# Altium PCB NodeXNanoPCB.PcbDoc
Units mm, origin at the board's own origin, x right, y up, seen from the top; angles counter-clockwise.
Board outline 34.5 x 53 mm, 4 copper layers (Component Side, Ground Plane, Power Plane, Solder Side), stack 0.844 mm thick; 37 components, 47 nets, 431 pads, 0 vias.
Unrouted connection lines stored in the file: 132.
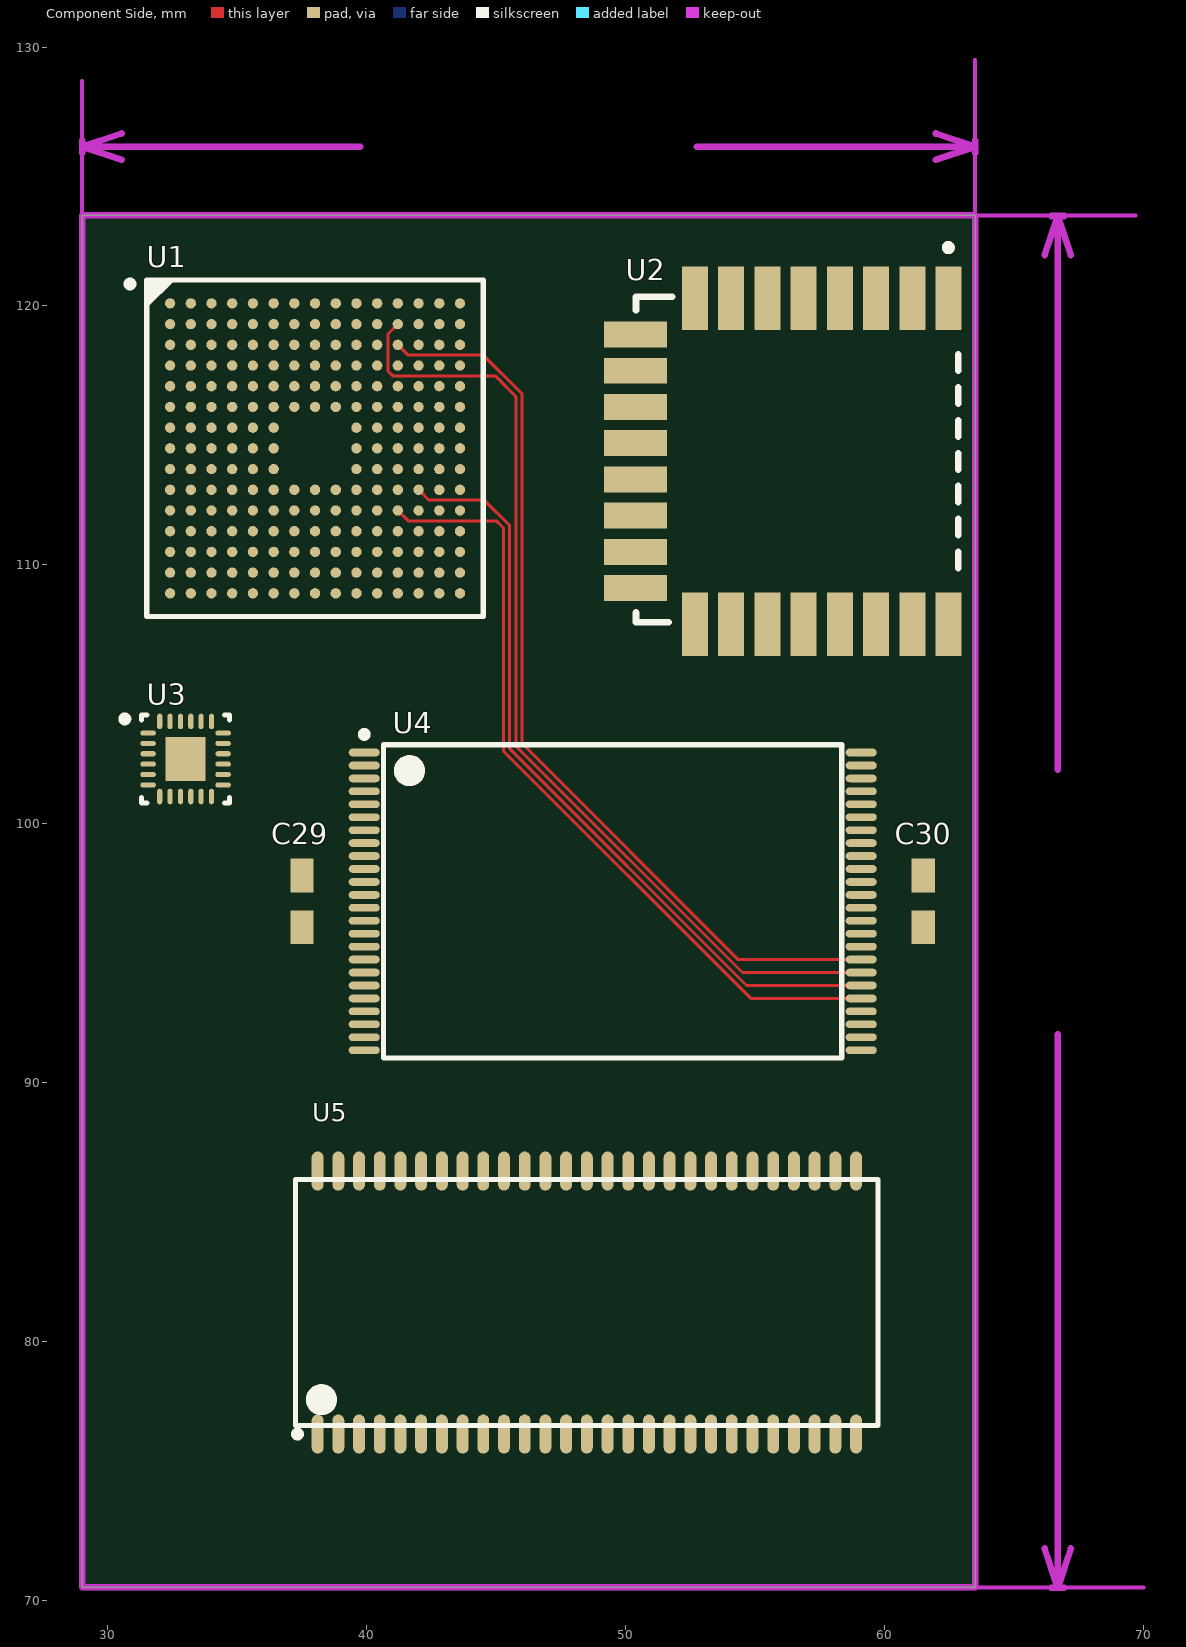
[diagram p0: Component Side view]
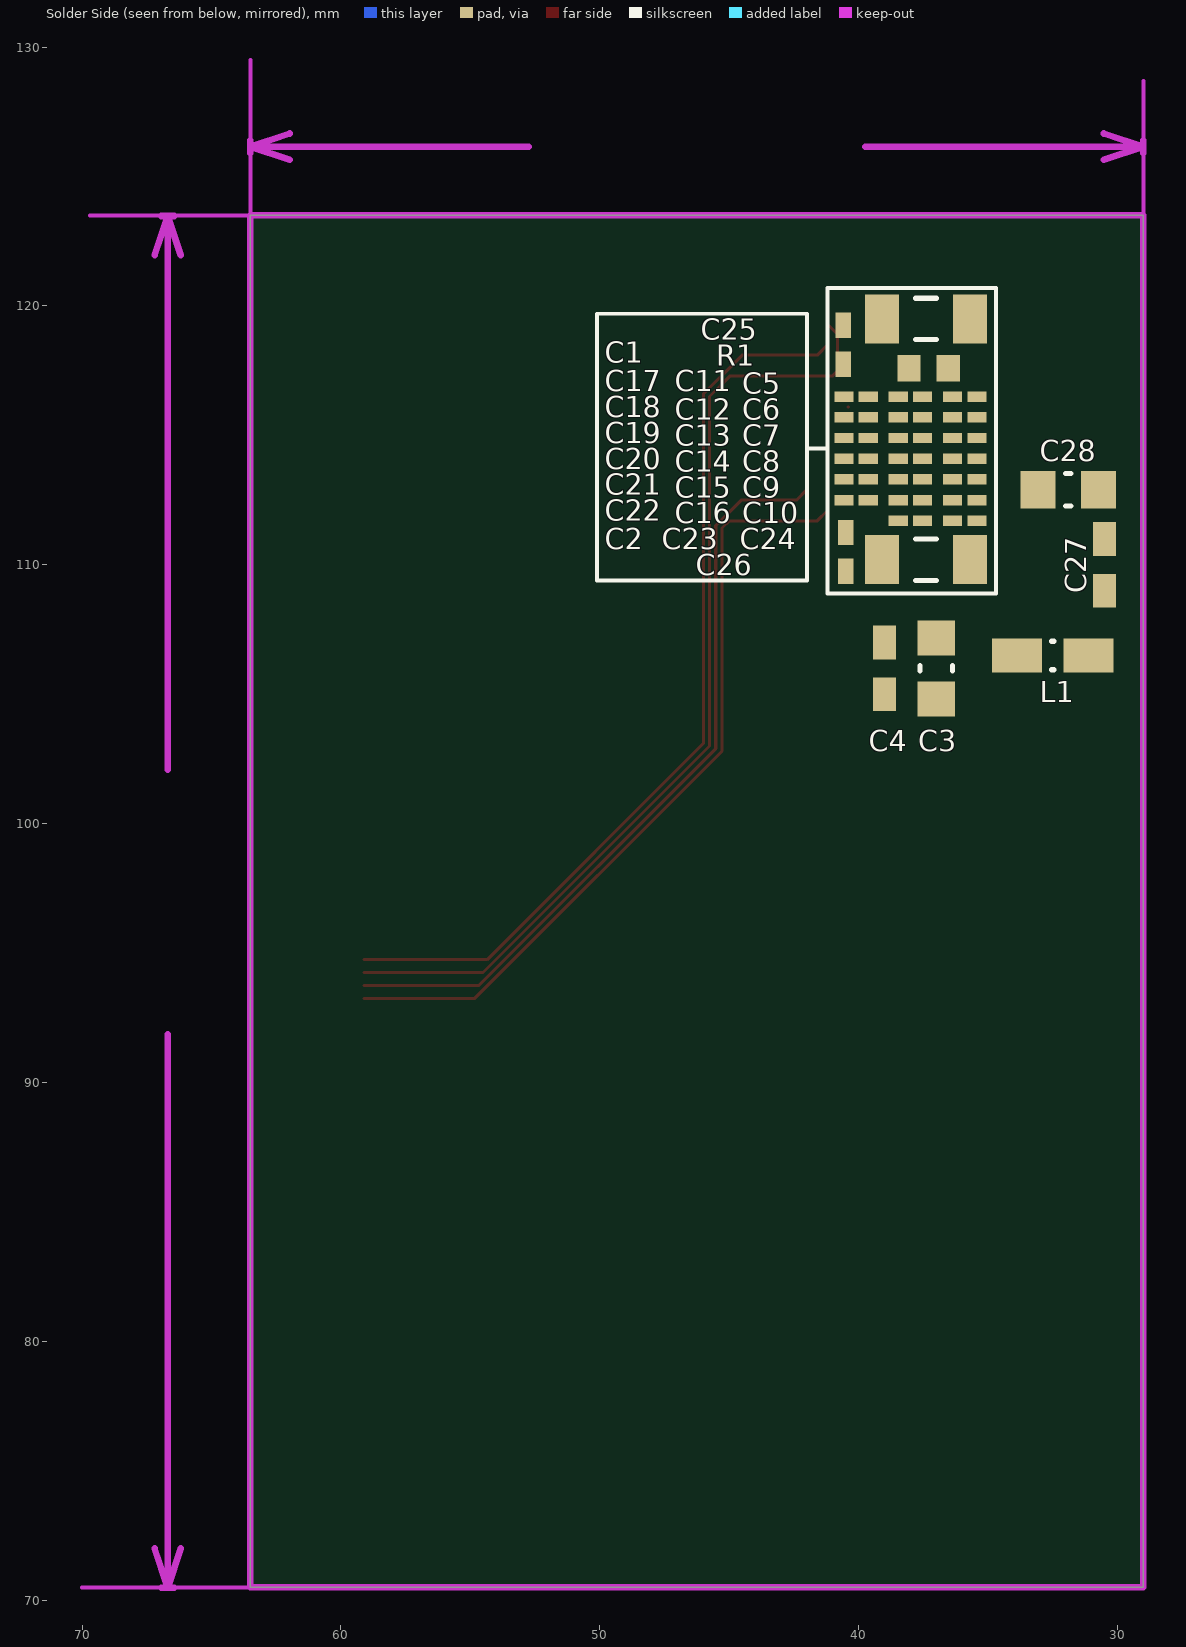
[diagram p1: Solder Side view, seen from below]
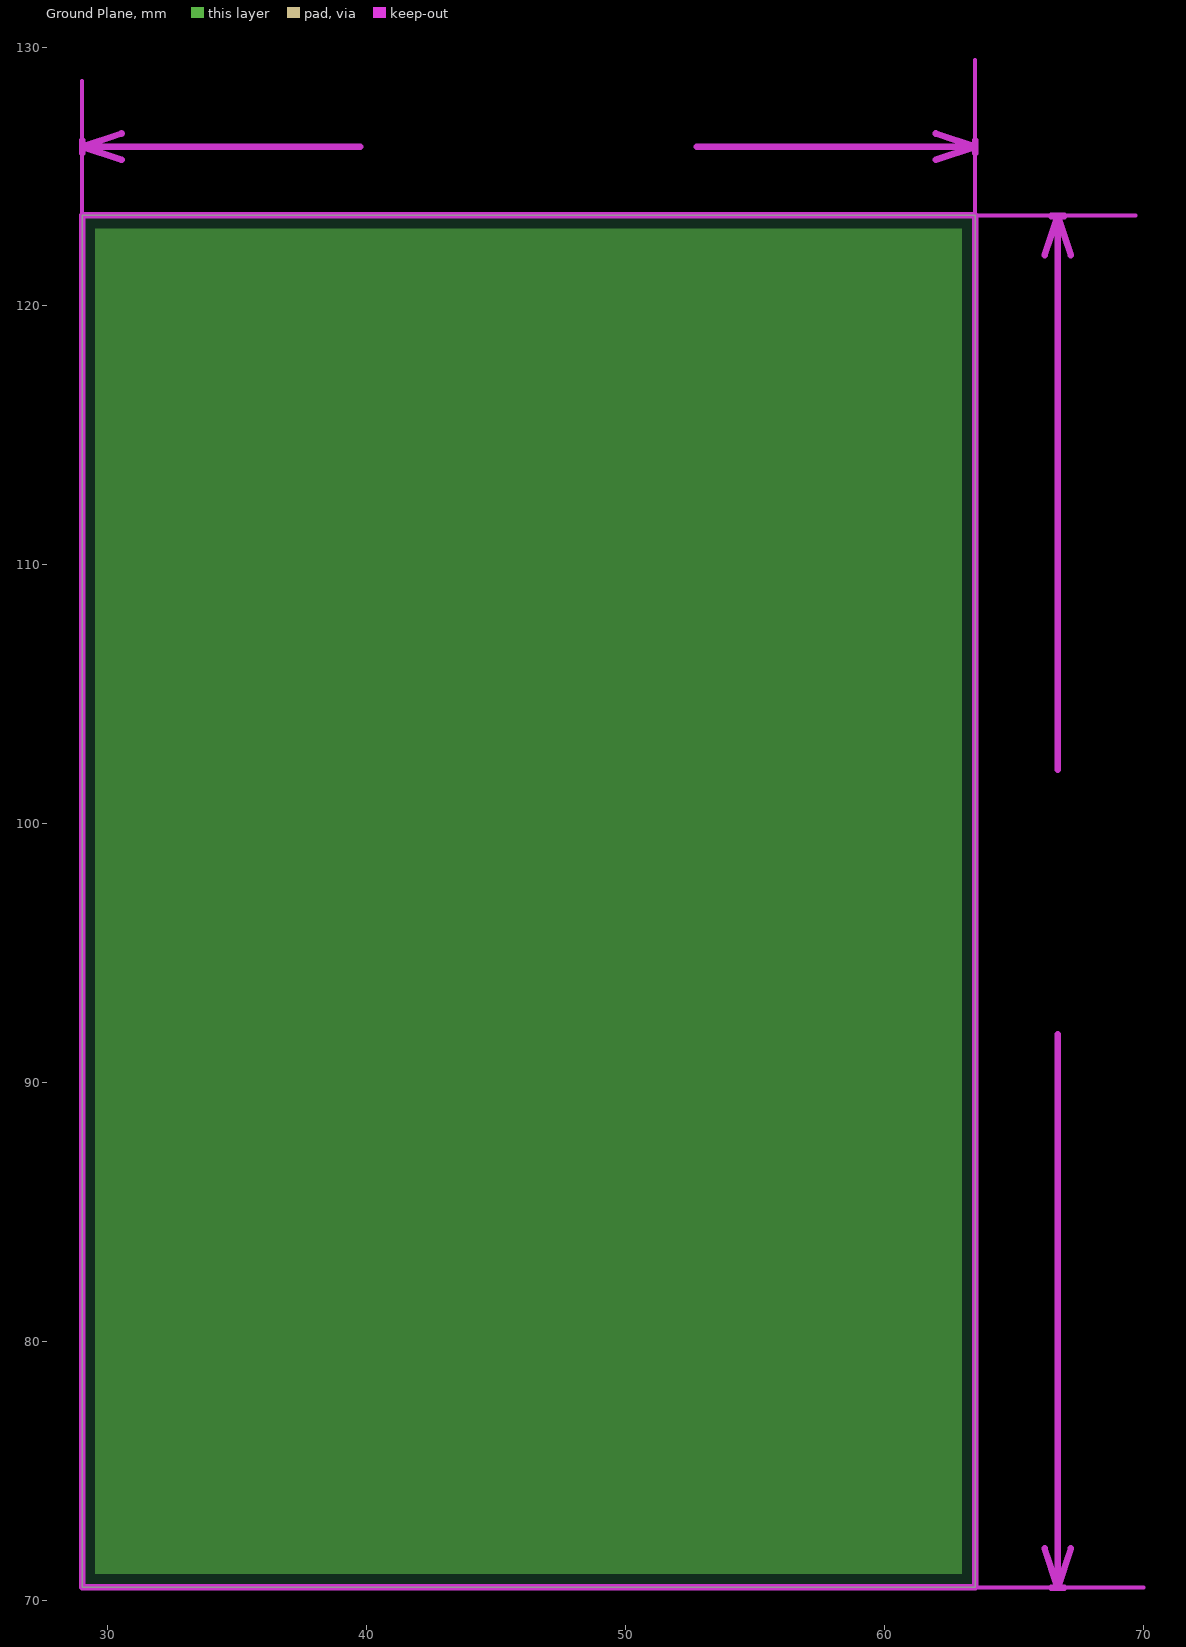
[diagram p2: Ground Plane, clearances drawn from the general rule]
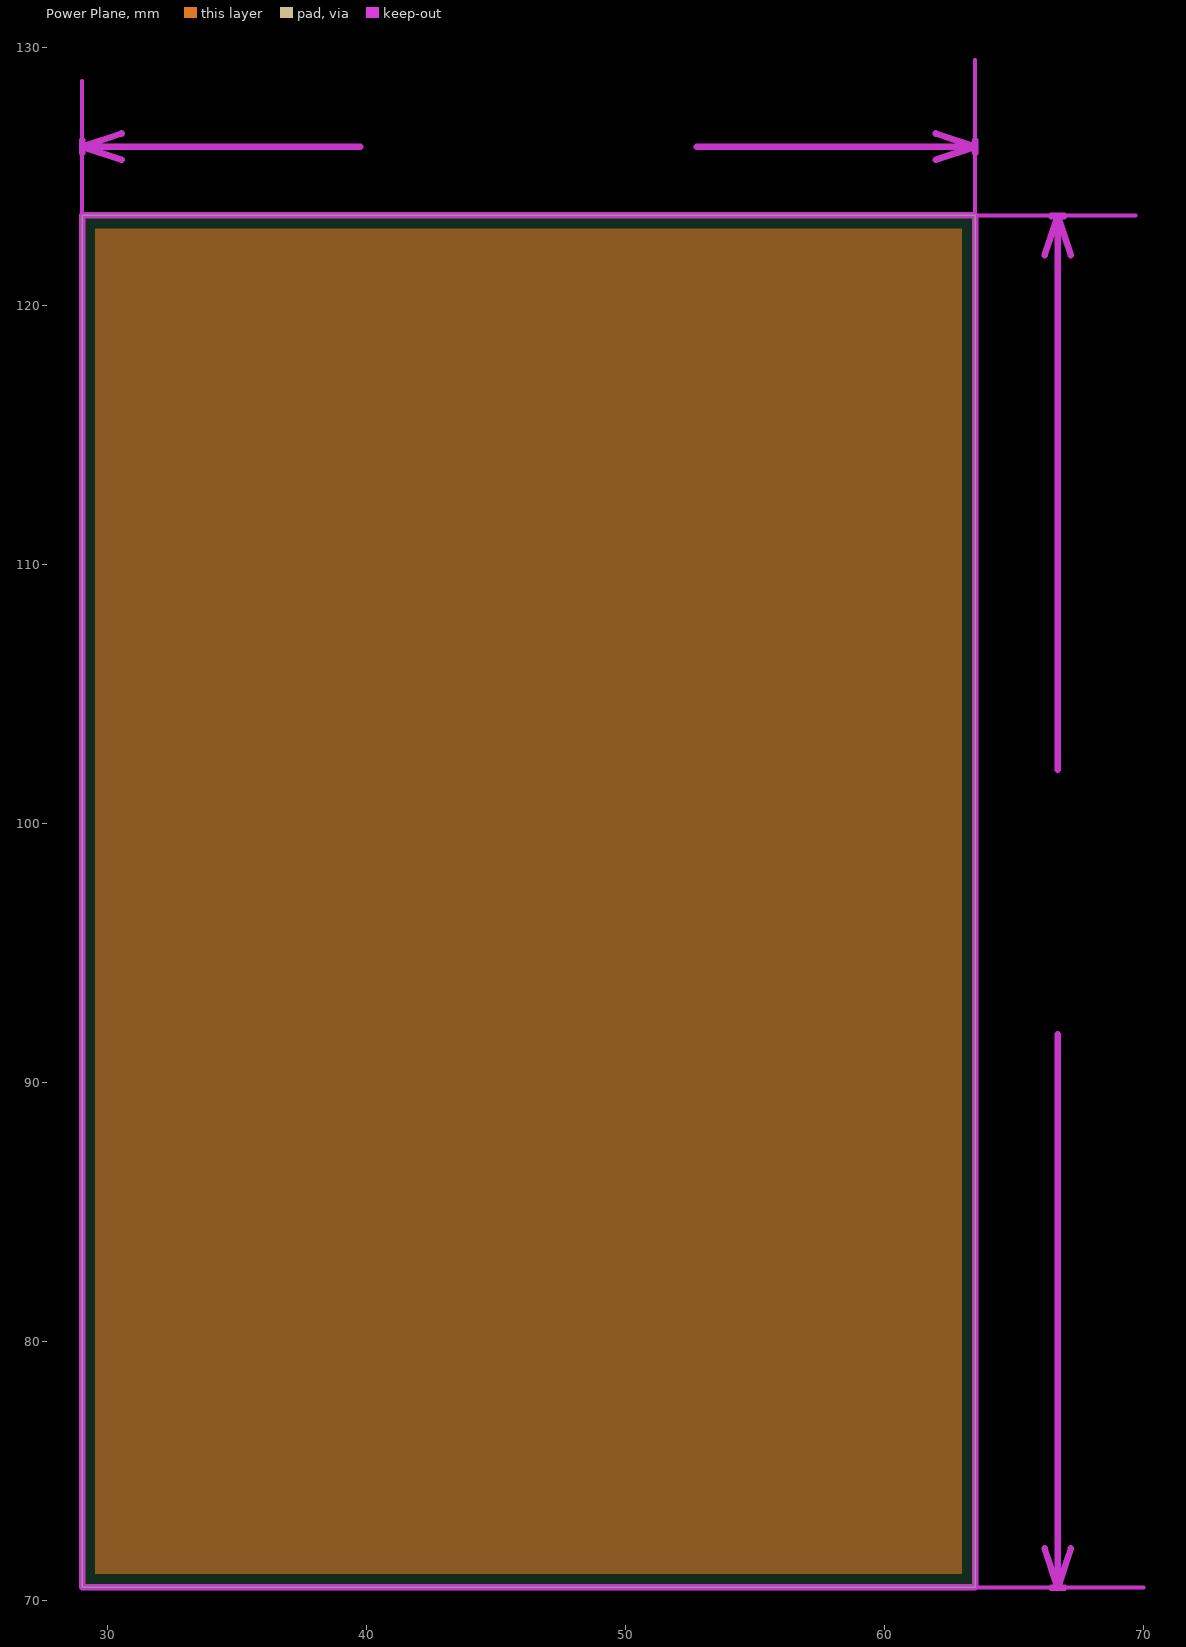
[diagram p3: Power Plane, clearances drawn from the general rule]

## Layer stack, top to bottom
Top Solder: solder mask 0.0102, Solder Resist, Dk 3.5
Component Side: signal copper 0.0356
Dielectric 1: core 0.32, FR-4, Dk 4.8
Ground Plane: plane copper 0.036
Dielectric 3: prepreg 0.127, Dk 4.2
Power Plane: plane copper 0.036
Dielectric 4: core 0.254, Dk 4.2
Solder Side: signal copper 0.0356
Bottom Solder: solder mask 0.0102, Solder Resist, Dk 3.5

## Board outline
29,70.5 63.5,70.5 63.5,123.5 29,123.5

## Design rules (kind name [scope] priority, off if disabled: settings)
Clearance [All] p1: gap=0.12
MinimumSolderMaskSliver [All] p1: minsoldermaskwidth=0.075
PlaneClearance [All] p1: clearance=0.2
PlaneConnect [All] p1: planeconnectstyle=Relief reliefexpansion=0.508 reliefentries=4 reliefconductorwidth=0.254 reliefairgap=0.254
PolygonConnect [All] p1: connectstyle=Relief reliefconductorwidth=0.254 reliefentries=4 polygonreliefangle="90 Angle" airgapwidth=0.254
RoomDefinition MemoryUnit [InComponentClass('MemoryUnit')] p1: confinementstyle=ConfineIn formatcopy=TRUE lockcomponents=FALSE outline 29,70.5 63.5,70.5 63,99.5 60.5,99.5 60.5,104 38.5,104 38.5,99.5 29,99.5
RoomDefinition Kernel [InComponentClass('Kernel')] p2: confinementstyle=ConfineIn formatcopy=TRUE lockcomponents=FALSE outline 29,99.5 38.5,99.5 38.5,104 60.5,104 60.5,99.5 74.5,99.5 74.5,123.5 29,123.5
RoutingVias [All] p1: holewidth=0.25 width=0.49 viastyle="Through Hole" minholewidth=0.25 minwidth=0.5 maxholewidth=3 maxwidth=5
SolderMaskExpansion [All] p1: expansion=0.075
Width [All] p1: maxlimit=2 minlimit=0.12 preferedwidth=0.12
27 further rules are at their usual default settings.

## Classes and differential pairs
component class MemoryUnit: C29 C30 U4 U5
component class Kernel: C1 C2 C3 C4 C5 C6 C7 C8 C9 C10 C11 C12 C13 C14 C15 C16 C17 C18 C19 C20 C21 C22 C23 C24 C25 C26 C27 C28 L1 R1 U1 U2 U3

## Components (designator, comment, footprint, x,y, rotation, side; value= is the part's Value field where it differs from the comment)
C1 "ChipCap" CAP0402 40.6,118.5 r90 bottom
C2 "ChipCap" CAP0402 40.5,110.5 r270 bottom
C3 "ChipCap" CAP0805 37,106 r270 bottom
C4 "ChipCap" CAP0603 39,106 r270 bottom
C5 "ChipCap" CAP0201 35.9,116.5 r0 bottom
C6 "ChipCap" CAP0201 35.9,115.7 r0 bottom
C7 "ChipCap" CAP0201 35.9,114.9 r0 bottom
C8 "ChipCap" CAP0201 35.9,114.1 r180 bottom
C9 "ChipCap" CAP0201 35.9,113.3 r180 bottom
C10 "ChipCap" CAP0201 35.9,112.5 r0 bottom
C11 "ChipCap" CAP0201 38,116.5 r0 bottom
C12 "ChipCap" CAP0201 38,115.7 r0 bottom
C13 "ChipCap" CAP0201 38,114.9 r180 bottom
C14 "ChipCap" CAP0201 38,114.1 r180 bottom
C15 "ChipCap" CAP0201 38,113.3 r0 bottom
C16 "ChipCap" CAP0201 38,112.5 r0 bottom
C17 "ChipCap" CAP0201 40.1,116.5 r180 bottom
C18 "ChipCap" CAP0201 40.1,115.7 r0 bottom
C19 "ChipCap" CAP0201 40.1,114.9 r0 bottom
C20 "ChipCap" CAP0201 40.1,114.1 r180 bottom
C21 "ChipCap" CAP0201 40.1,113.3 r180 bottom
C22 "ChipCap" CAP0201 40.1,112.5 r180 bottom
C23 "ChipCap" CAP0201 35.9,111.7 r0 bottom
C24 "ChipCap" CAP0201 38,111.7 r0 bottom
C25 "Cap chip" CAPC3216 37.4,119.5 r180 bottom
C26 "Cap chip" CAPC3216 37.4,110.2 r180 bottom
C27 "ChipCap" CAP0805 31.9,112.9 r0 bottom
C28 "ChipCap" CAP0603 30.5,110 r90 bottom
C29 "ChipCap" CAP0603 37.5,97 r90 top
C30 "ChipCap" CAP0603 61.5,97 r90 top
L1 "Inductance" CM20 32.5,106.5 r180 bottom
R1 "ChipRes" RES0603 37.3,117.6 r180 bottom
U1 "STM32F767NI" TFBGA216 38,114.5 r0 top
U2 "DWM1000" DWM1000 63.1,114 r270 top
U3 "MPU-9250" QFN24 33,102.5 r0 top
U4 "MT29F2G08AAC" "TSOP-I 48" 49.5,97 r0 top
U5 "MT48LC32M16A2P" "TSOP-II 54" 48.5,81.5 r90 top

## Footprints (in the part's own frame and the unit in brackets; to place one, negate y for a bottom-side part, rotate by r counter-clockwise, add the part's x,y. Pads: shape width x height; smd on the part's side, far side on the other; paste and mask are expansions set on the pad)
CAP0201 [mm] "Chip Capacitor, 2-Leads, Body 0.65x0.30mm, IPC Medium Density"
  rect 0.74x0.4 smd: 1(-0.47,0) 2(0.47,0)
  body extent -0.32,-0.15 0.33,0.15, height 0.55
CAP0402 [mm]
  rect 0.98x0.6 smd: 1(-0.75,0) 2(0.75,0)
  body extent -0.75,-0.25 0.75,0.25, height 0.55
CAP0603 [mm]
  rect 1.3x0.9 smd: 1(-1,0) 2(1,0)
  body extent -1.15,-0.4 1.15,0.4, height 0.55
CAP0805 [mm]
  rect 1.35x1.45 smd: 1(-1.175,0) 2(1.175,0)
  silkscreen extent -0.1,-0.63 0.1,0.63, body extent -1.4,-0.65 1.4,0.65, height 0.55
CAPC3216 [mm] "Chip Capacitor, Body 3.2x1.6mm, IPC Medium Density"
  rect 1.3x1.9 smd: 1(-1.7,0) 2(1.7,0)
  silkscreen extent -0.4,-0.8 0.4,0.8, body extent -1.6,-0.81 1.6,0.81, height 1.02
CM20 [mm]
  rect 1.94x1.3 smd: 1(-1.385,0) 2(1.385,0)
  silkscreen extent -0.05,-0.55 0.05,0.55, body extent -1.9,-0.65 1.9,0.65, height 0.55
DWM1000 [mm] "UWB transceiver"
  rect 2.45x1 smd: 1(-6.295,-0.625) 2(-6.295,-2.025) 3(-6.295,-3.425) 4(-6.295,-4.825) 5(-6.295,-6.225) 6(-6.295,-7.625) 7(-6.295,-9.025) 8(-6.295,-10.425) 17(6.295,-10.425) 18(6.295,-9.025) 19(6.295,-7.625) 20(6.295,-6.225) 21(6.295,-4.825) 22(6.295,-3.425) 23(6.295,-2.025) 24(6.295,-0.625)
  rect 1x2.45 smd: 9(-4.9,-12.72) 10(-3.5,-12.72) 11(-2.1,-12.72) 12(-0.7,-12.72) 13(0.7,-12.72) 14(2.1,-12.72) 15(3.5,-12.72) 16(4.9,-12.72)
  silkscreen extent -8.38,-12.7 6.22,-0.25
QFN24 [mm] "QFN, 24-Leads, Body 3.00x3.00mm, Pitch 0.40mm, Thermal Pad 1.54x1.70mm, IPC High Density"
  oval 0.6x0.2 smd: 1(-1.45,1) 2(-1.45,0.6) 3(-1.45,0.2) 4(-1.45,-0.2) 5(-1.45,-0.6) 6(-1.45,-1) 13(1.45,-1) 14(1.45,-0.6) 15(1.45,-0.2) 16(1.45,0.2) 17(1.45,0.6) 18(1.45,1)
  oval 0.2x0.6 smd: 7(-1,-1.45) 8(-0.6,-1.45) 9(-0.2,-1.45) 10(0.2,-1.45) 11(0.6,-1.45) 12(1,-1.45) 19(1,1.45) 20(0.6,1.45) 21(0.2,1.45) 22(-0.2,1.45) 23(-0.6,1.45) 24(-1,1.45)
  rect 1.54x1.7 smd: 25(0,0)
  silkscreen extent -2.47,-1.7 1.7,1.7, body extent -1.55,-1.55 1.55,1.55, height 1
RES0603 [mil]
  rect 35x40 smd: 1(-30,0) 2(30,0)
TFBGA216 [mm] "BGA, 216-Leads, Body 13,00x13,00mmx1,10mm, Pitch 0,80mm"
  round 0.4 smd: A1(-5.6,5.6) A2(-4.8,5.6) A3(-4,5.6) A4(-3.2,5.6) A5(-2.4,5.6) A6(-1.6,5.6) A7(-0.8,5.6) A8(0,5.6) A9(0.8,5.6) A10(1.6,5.6) A11(2.4,5.6) A12(3.2,5.6) A13(4,5.6) A14(4.8,5.6) A15(5.6,5.6) B1(-5.6,4.8) B2(-4.8,4.8) B3(-4,4.8) B4(-3.2,4.8) B5(-2.4,4.8) B6(-1.6,4.8) B7(-0.8,4.8) B8(0,4.8) B9(0.8,4.8) B10(1.6,4.8) B11(2.4,4.8) B12(3.2,4.8) B13(4,4.8) B14(4.8,4.8) B15(5.6,4.8) C1(-5.6,4) C2(-4.8,4) C3(-4,4) C4(-3.2,4) C5(-2.4,4) C6(-1.6,4) C7(-0.8,4) C8(0,4) C9(0.8,4) C10(1.6,4) C11(2.4,4) C12(3.2,4) C13(4,4) C14(4.8,4) C15(5.6,4) D1(-5.6,3.2) D2(-4.8,3.2) D3(-4,3.2) D4(-3.2,3.2) D5(-2.4,3.2) D6(-1.6,3.2) D7(-0.8,3.2) D8(0,3.2) D9(0.8,3.2) D10(1.6,3.2) D11(2.4,3.2) D12(3.2,3.2) D13(4,3.2) D14(4.8,3.2) D15(5.6,3.2) E1(-5.6,2.4) E2(-4.8,2.4) E3(-4,2.4) E4(-3.2,2.4) E5(-2.4,2.4) E6(-1.6,2.4) E7(-0.8,2.4) E8(0,2.4) E9(0.8,2.4) E10(1.6,2.4) E11(2.4,2.4) E12(3.2,2.4) E13(4,2.4) E14(4.8,2.4) E15(5.6,2.4) F1(-5.6,1.6) F2(-4.8,1.6) F3(-4,1.6) F4(-3.2,1.6) F5(-2.4,1.6) F6(-1.6,1.6) F7(-0.8,1.6) F8(0,1.6) F9(0.8,1.6) F10(1.6,1.6) F11(2.4,1.6) F12(3.2,1.6) F13(4,1.6) F14(4.8,1.6) F15(5.6,1.6) G1(-5.6,0.8) G2(-4.8,0.8) G3(-4,0.8) G4(-3.2,0.8) G5(-2.4,0.8) G6(-1.6,0.8) G10(1.6,0.8) G11(2.4,0.8) G12(3.2,0.8) G13(4,0.8) G14(4.8,0.8) G15(5.6,0.8) H1(-5.6,0) H2(-4.8,0) H3(-4,0) H4(-3.2,0) H5(-2.4,0) H6(-1.6,0) H10(1.6,0) H11(2.4,0) H12(3.2,0) H13(4,0) H14(4.8,0) H15(5.6,0) J1(-5.6,-0.8) J2(-4.8,-0.8) J3(-4,-0.8) J4(-3.2,-0.8) J5(-2.4,-0.8) J6(-1.6,-0.8) J10(1.6,-0.8) J11(2.4,-0.8) J12(3.2,-0.8) J13(4,-0.8) J14(4.8,-0.8) J15(5.6,-0.8) K1(-5.6,-1.6) K2(-4.8,-1.6) K3(-4,-1.6) K4(-3.2,-1.6) K5(-2.4,-1.6) K6(-1.6,-1.6) K7(-0.8,-1.6) K8(0,-1.6) K9(0.8,-1.6) K10(1.6,-1.6) K11(2.4,-1.6) K12(3.2,-1.6) K13(4,-1.6) K14(4.8,-1.6) K15(5.6,-1.6) L1(-5.6,-2.4) L2(-4.8,-2.4) L3(-4,-2.4) L4(-3.2,-2.4) L5(-2.4,-2.4) L6(-1.6,-2.4) L7(-0.8,-2.4) L8(0,-2.4) L9(0.8,-2.4) L10(1.6,-2.4) L11(2.4,-2.4) L12(3.2,-2.4) L13(4,-2.4) L14(4.8,-2.4) L15(5.6,-2.4) M1(-5.6,-3.2) M2(-4.8,-3.2) M3(-4,-3.2) M4(-3.2,-3.2) M5(-2.4,-3.2) M6(-1.6,-3.2) M7(-0.8,-3.2) M8(0,-3.2) M9(0.8,-3.2) M10(1.6,-3.2) M11(2.4,-3.2) M12(3.2,-3.2) M13(4,-3.2) M14(4.8,-3.2) M15(5.6,-3.2) N1(-5.6,-4) N2(-4.8,-4) N3(-4,-4) N4(-3.2,-4) N5(-2.4,-4) N6(-1.6,-4) N7(-0.8,-4) N8(0,-4) N9(0.8,-4) N10(1.6,-4) N11(2.4,-4) N12(3.2,-4) N13(4,-4) N14(4.8,-4) N15(5.6,-4) P1(-5.6,-4.8) P2(-4.8,-4.8) P3(-4,-4.8) P4(-3.2,-4.8) P5(-2.4,-4.8) P6(-1.6,-4.8) P7(-0.8,-4.8) P8(0,-4.8) P9(0.8,-4.8) P10(1.6,-4.8) P11(2.4,-4.8) P12(3.2,-4.8) P13(4,-4.8) P14(4.8,-4.8) P15(5.6,-4.8) R1(-5.6,-5.6) R2(-4.8,-5.6) R3(-4,-5.6) R4(-3.2,-5.6) R5(-2.4,-5.6) R6(-1.6,-5.6) R7(-0.8,-5.6) R8(0,-5.6) R9(0.8,-5.6) R10(1.6,-5.6) R11(2.4,-5.6) R12(3.2,-5.6) R13(4,-5.6) R14(4.8,-5.6) R15(5.6,-5.6)
  silkscreen extent -7.27,-6.5 6.5,6.5, body extent -6.5,-6.5 6.5,6.5, height 1.1
"TSOP-I 48" [mm] "TSSOP, 48-Leads, Body 12.00x18.40mm, Pitch 0.50mm, IPC Medium Density"
  oval 1.2x0.3 smd: 1(-9.6,5.75) 2(-9.6,5.25) 3(-9.6,4.75) 4(-9.6,4.25) 5(-9.6,3.75) 6(-9.6,3.25) 7(-9.6,2.75) 8(-9.6,2.25) 9(-9.6,1.75) 10(-9.6,1.25) 11(-9.6,0.75) 12(-9.6,0.25) 13(-9.6,-0.25) 14(-9.6,-0.75) 15(-9.6,-1.25) 16(-9.6,-1.75) 17(-9.6,-2.25) 18(-9.6,-2.75) 19(-9.6,-3.25) 20(-9.6,-3.75) 21(-9.6,-4.25) 22(-9.6,-4.75) 23(-9.6,-5.25) 24(-9.6,-5.75) 25(9.6,-5.75) 26(9.6,-5.25) 27(9.6,-4.75) 28(9.6,-4.25) 29(9.6,-3.75) 30(9.6,-3.25) 31(9.6,-2.75) 32(9.6,-2.25) 33(9.6,-1.75) 34(9.6,-1.25) 35(9.6,-0.75) 36(9.6,-0.25) 37(9.6,0.25) 38(9.6,0.75) 39(9.6,1.25) 40(9.6,1.75) 41(9.6,2.25) 42(9.6,2.75) 43(9.6,3.25) 44(9.6,3.75) 45(9.6,4.25) 46(9.6,4.75) 47(9.6,5.25) 48(9.6,5.75)
  silkscreen extent -9.72,-6.05 8.85,6.57, body extent -9.25,-6.05 9.25,6.05, height 1.2
"TSOP-II 54" [mm] "TSOP, 54-Leads, Body 22.41x10.16mm, Pitch 0.80mm, IPC Medium Density"
  oval 1.51x0.458 smd: 1(-5.08,10.4) 2(-5.08,9.6) 3(-5.08,8.8) 4(-5.08,8) 5(-5.08,7.2) 6(-5.08,6.4) 7(-5.08,5.6) 8(-5.08,4.8) 9(-5.08,4) 10(-5.08,3.2) 11(-5.08,2.4) 12(-5.08,1.6) 13(-5.08,0.8) 14(-5.08,0) 15(-5.08,-0.8) 16(-5.08,-1.6) 17(-5.08,-2.4) 18(-5.08,-3.2) 19(-5.08,-4) 20(-5.08,-4.8) 21(-5.08,-5.6) 22(-5.08,-6.4) 23(-5.08,-7.2) 24(-5.08,-8) 25(-5.08,-8.8) 26(-5.08,-9.6) 27(-5.08,-10.4) 28(5.08,-10.4) 29(5.08,-9.6) 30(5.08,-8.8) 31(5.08,-8) 32(5.08,-7.2) 33(5.08,-6.4) 34(5.08,-5.6) 35(5.08,-4.8) 36(5.08,-4) 37(5.08,-3.2) 38(5.08,-2.4) 39(5.08,-1.6) 40(5.08,-0.8) 41(5.08,0) 42(5.08,0.8) 43(5.08,1.6) 44(5.08,2.4) 45(5.08,3.2) 46(5.08,4) 47(5.08,4.8) 48(5.08,5.6) 49(5.08,6.4) 50(5.08,7.2) 51(5.08,8) 52(5.08,8.8) 53(5.08,9.6) 54(5.08,10.4)
  silkscreen extent -5.2,-11.25 4.75,11.3, body extent -5.15,-11.25 5.15,11.25, height 1

## Part data
C1 C2 C3 C4 C5 C6 C7 C8 C9 C10 C11 C12 C13 C14 C15 C16 C17 C18 C19 C20 C21 C22 C23 C24 C27 C28 C29 C30: "Capacitor"
C25 C26: "Chip Capacitor"
L1: library part ChipInductance
R1: "Chip resistor"
U2: "UWB transceiver"
U3: "9-Axis sensor"
U5: "SDRAM 512Mb x16"

## Nets (pads, with @x,y where several pads share a name; then routed paths per layer and width w, separated by ;. In a path a pad name is that pad's centre, name@x,y a point inside that pad or via, vN(x,y) a via of type N, cw(c..) or ccw(c..) an arc to the next point about the centre after c; other vN are vias at no path point)
A0: U5.23
A1: U5.24
A2: U5.25
A3: U5.26
A4: U5.29
A5: U5.30
A6: U5.31
A7: U5.32
A8: U5.33
A9: U5.34
A10: U5.22
A11: U5.35
A12: U5.36
AGND: C1.2 C2.2 C3.2 C4.2 C5.2 C6.2 C7.2 C8.1 C9.1 C10.2 C11.2 C12.2 C13.1 C14.1 C15.2 C16.2 C17.2 C18.1 C19.1 C20.2 C21.2 C22.2 C23.1 C24.1 C25.1 C26.1 C27.2 C28.2 C29.1 C30.1 U1.F2 U1.F6 U1.F7 U1.F8 U1.F9 U1.F10 U1.G6 U1.G10 U1.H6 U1.H10 U1.J6 U1.J10 U1.K6 U1.K7 U1.K8 U1.K9 U1.K10 U1.L6 U1.M1 U4.13 U4.36 U4.38
ALE: U1.M10 U4.17
AVCC: C27.1 C28.1 L1.2 U1.R1
CLE: U1.N10 U4.16
D0: U1.L12 U4.29 U5.2 | length 30.8
  Component Side w0.12: U1.L12 41.6,111.7 45,111.7 45.28,111.42 45.28,102.802 54.832,93.25 U4.29
D1: U1.K13 U4.30 U5.4 | length 30.1
  Component Side w0.12: U1.K13 42.4,112.5 44.539,112.5 45.52,111.519 45.52,102.901 54.671,93.75 U4.30
D2: U1.B12 U4.31 U5.5 | length 37.8
  Component Side w0.12: U1.B12 40.82,118.92 40.82,117.48 41,117.3 44.961,117.3 45.76,116.501 45.76,103.001 54.511,94.25 U4.31
D3: U1.C12 U4.32 U5.7 | length 35.6
  Component Side w0.12: U1.C12 41.6,118.1 44.5,118.1 46,116.6 46,103.1 54.35,94.75 U4.32
D4: U1.R8 U4.41 U5.8
D5: U1.N9 U4.42 U5.10
D6: U1.P9 U4.43 U5.11
D7: U1.R9 U4.44 U5.13
D8: U1.P10 U5.42
D9: U1.R10 U5.44
D10: U1.R12 U5.45
D11: U1.P11 U5.47
D12: U1.R11 U5.48
D13: U1.L15 U5.50
D14: U1.L14 U5.51
D15: U1.K15 U5.53
INT: U1.J14
NCE: U1.D9 U4.9
NetC1_1: C1.1 U1.E11
NetC2_1: C2.1 U1.L11
NetR1_2: R1.2 U1.E6
NOE: U1.D11 U4.8
NRESET: U1.J1
NWAIT: U1.B11 U4.7
NWE: U1.C10 U4.18
NWP: U4.19
VBAT: U1.C1
VCC: C5.1 C6.1 C7.1 C8.2 C9.2 C10.1 C11.1 C12.1 C13.2 C14.2 C15.1 C16.1 C17.1 C18.2 C19.2 C20.1 C21.1 C22.1 C23.2 C24.2 C25.2 C26.2 C29.2 C30.2 L1.1 R1.1 U1.E7 U1.E8 U1.E9 U1.E10 U1.F4 U1.F5 U1.F11 U1.G5 U1.G11 U1.H5 U1.H11 U1.J5 U1.J11 U1.K5 U1.K11 U1.L5 U1.L7 U1.L8 U1.L9 U1.L10 U4.12 U4.37 | length 0
VREFN: U1.N1
VREFP: C3.1 C4.1 U1.P1
pads on no net: U1.A1 U1.A2 U1.A3 U1.A4 U1.A5 U1.A6 U1.A7 U1.A8 U1.A9 U1.A10 U1.A11 U1.A12 U1.A13 U1.A14 U1.A15 U1.B1 U1.B2 U1.B3 U1.B4 U1.B5 U1.B6 U1.B7 U1.B8 U1.B9 U1.B10 U1.B13 U1.B14 U1.B15 U1.C2 U1.C3 U1.C4 U1.C5 U1.C6 U1.C7 U1.C8 U1.C9 U1.C11 U1.C13 U1.C14 U1.C15 U1.D1 U1.D2 U1.D3 U1.D4 U1.D5 U1.D6 U1.D7 U1.D8 U1.D10 U1.D12 U1.D13 U1.D14 U1.D15 U1.E1 U1.E2 U1.E3 U1.E4 U1.E5 U1.E12 U1.E13 U1.E14 U1.E15 U1.F1 U1.F3 U1.F12 U1.F13 U1.F14 U1.F15 U1.G1 U1.G2 U1.G3 U1.G4 U1.G12 U1.G13 U1.G14 U1.G15 U1.H1 U1.H2 U1.H3 U1.H4 U1.H12 U1.H13 U1.H14 U1.H15 U1.J2 U1.J3 U1.J4 U1.J12 U1.J13 U1.J15 U1.K1 U1.K2 U1.K3 U1.K4 U1.K12 U1.K14 U1.L1 U1.L2 U1.L3 U1.L4 U1.L13 U1.M2 U1.M3 U1.M4 U1.M5 U1.M6 U1.M7 U1.M8 U1.M9 U1.M11 U1.M12 U1.M13 U1.M14 U1.M15 U1.N2 U1.N3 U1.N4 U1.N5 U1.N6 U1.N7 U1.N8 U1.N11 U1.N12 U1.N13 U1.N14 U1.N15 U1.P2 U1.P3 U1.P4 U1.P5 U1.P6 U1.P7 U1.P8 U1.P12 U1.P13 U1.P14 U1.P15 U1.R2 U1.R3 U1.R4 U1.R5 U1.R6 U1.R7 U1.R13 U1.R14 U1.R15 U2.1 U2.2 U2.3 U2.4 U2.5 U2.6 U2.7 U2.8 U2.9 U2.10 U2.11 U2.12 U2.13 U2.14 U2.15 U2.16 U2.17 U2.18 U2.19 U2.20 U2.21 U2.22 U2.23 U2.24 U3.1 U3.2 U3.3 U3.4 U3.5 U3.6 U3.7 U3.8 U3.9 U3.10 U3.11 U3.12 U3.13 U3.14 U3.15 U3.16 U3.17 U3.18 U3.19 U3.20 U3.21 U3.22 U3.23 U3.24 U3.25 U4.1 U4.2 U4.3 U4.4 U4.5 U4.6 U4.10 U4.11 U4.14 U4.15 U4.20 U4.21 U4.22 U4.23 U4.24 U4.25 U4.26 U4.27 U4.28 U4.33 U4.34 U4.35 U4.39 U4.40 U4.45 U4.46 U4.47 U4.48 U5.1 U5.3 U5.6 U5.9 U5.12 U5.14 U5.15 U5.16 U5.17 U5.18 U5.19 U5.20 U5.21 U5.27 U5.28 U5.37 U5.38 U5.39 U5.40 U5.41 U5.43 U5.46 U5.49 U5.52 U5.54

## Polygon pours and split planes (outlines as drawn)
no net on Ground Plane (split plane): 62.99,71.01 29.51,71.01 29.51,122.99 62.99,122.99
no net on Power Plane (split plane): 62.99,71.01 29.51,71.01 29.51,122.99 62.99,122.99

## Keep-outs
Keep-Out Layer:
  lines w0.15: 29,123.5 29,128.7 ; 63.5,70.5 70,70.5 ; 63.5,129.5 63.5,123.5 69.7,123.5
  lines w0.254: 29,125.9 29,126.408 ; 30.524,125.646 29,126.154 ; 30.524,126.662 29,126.154 ; 39.75,126.154 29,126.154 ; 52.75,126.154 63.5,126.154 ; 61.976,125.646 63.5,126.154 ; 61.976,126.662 63.5,126.154 ; 63.5,125.9 63.5,126.408 ; 66.184,72 66.692,70.476 ; 66.184,121.952 66.692,123.476 ; 66.438,70.476 66.946,70.476 ; 66.438,123.476 66.946,123.476 ; 66.692,91.872 66.692,70.476 ; 66.692,102.08 66.692,123.476 ; 67.2,72 66.692,70.476 ; 67.2,121.952 66.692,123.476 ; 29,70.5 29,123.5 63,123.5 63.5,123.5 63.5,70.5 29,70.5
  text "34.5 (mm)" at 40.004,125.24 h1.52
  text "53 (mm)" at 67.606,92.126 h1.52 r90

## Silkscreen, mask and mechanical layers (free items; w line width, h text height)
Bottom Overlay:
  lines w0.15: 41.2,114.5 42,114.5 ; 34.7,108.9 34.7,120.7 41.2,120.7 41.2,108.9 34.7,108.9 ; 42,109.4 42,119.7 50.1,119.7 50.1,109.4 42,109.4